# EAGLE board PCBtest_final (EAGLE 9.6.2)
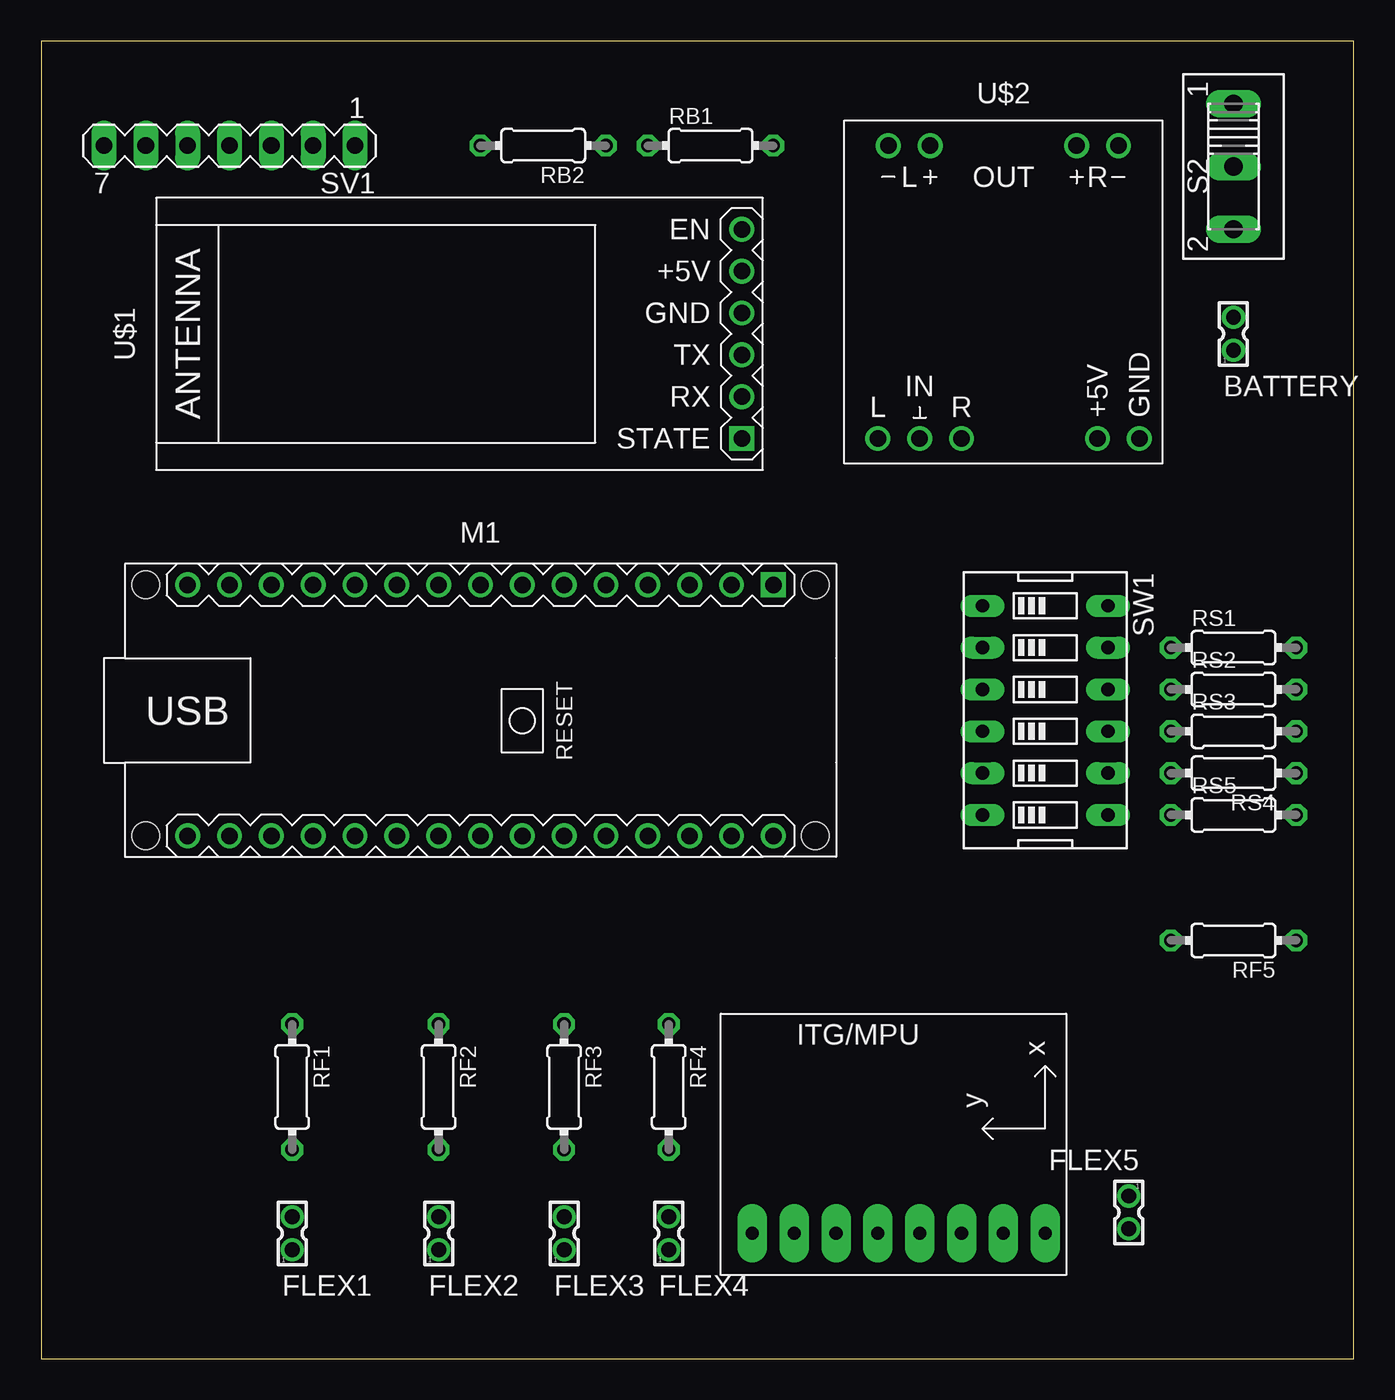
[diagram p0: board, top side]
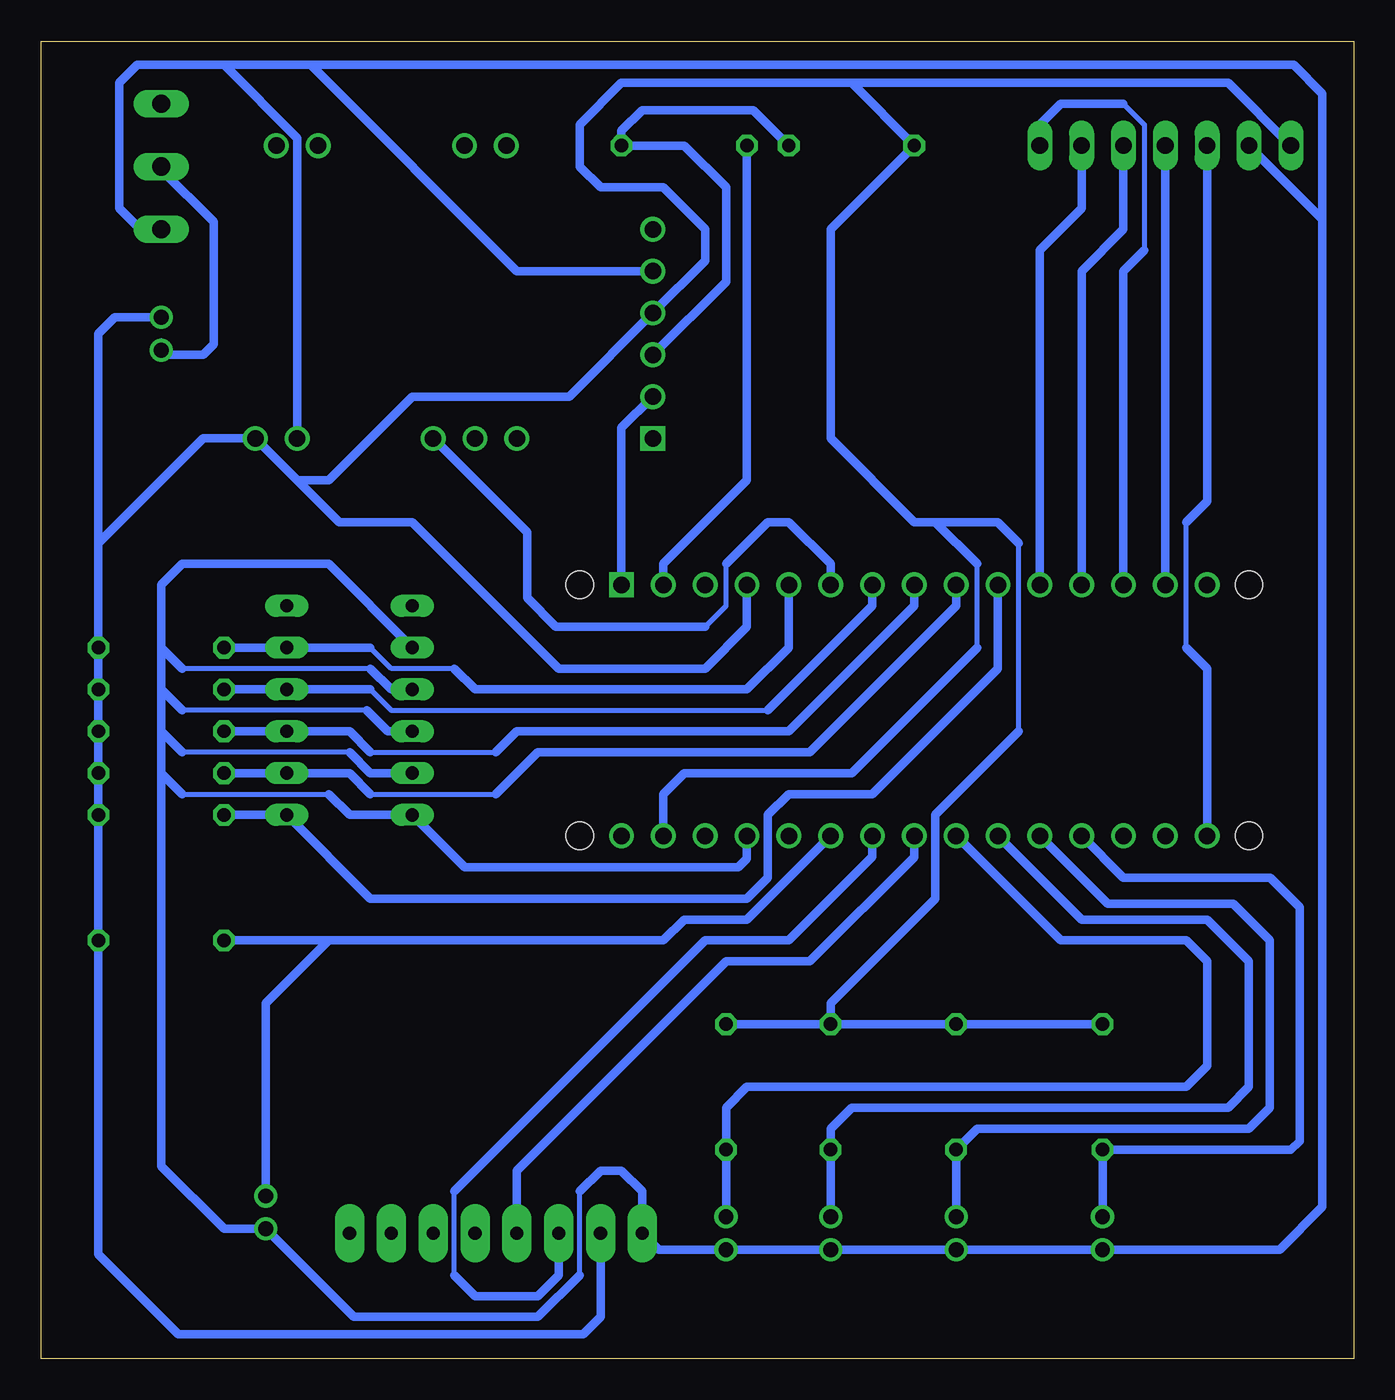
[diagram p1: board, bottom side, seen from below]

Size 79.68 x 80 mm. Coordinates in mm from the lower left corner, seen from the top.
Outline: 0,0 79.68,0 79.68,80 0,80 0,0
Copper layers (1*16): Top 0.035mm / dielectric 1.5mm / Bottom 0.035mm
Design rules "default": minimum track width 6mil, minimum drill 0.35mm, track to track 6mil, track to pad 6mil, pad to pad 6mil, via to via 6mil, smd to smd 6mil, copper to edge 40mil, drill to drill 6mil, minimum pad ring 10mil, minimum via ring 8mil, stop-mask expansion 4mil, vias tented up to drill 0mil, thermal gap 10mil

## Footprints (pad centres in the part's own frame; a part is rotated, then mirrored left to right if it is on the bottom)
332-02 = drill 0.9 pad 1.27: 1 0,-1; 2 0,1
ARDUINO-NANO-3.0 = drill 1 square: J1.1 17.78,7.62 | drill 1: J1.2 15.24,7.62; J1.3 12.7,7.62; J1.4 10.16,7.62; J1.5 7.62,7.62; J1.6 5.08,7.62; J1.7 2.54,7.62; J1.8 0,7.62; J1.9 -2.54,7.62; J1.10 -5.08,7.62; J1.11 -7.62,7.62; J1.12 -10.16,7.62; J1.13 -12.7,7.62; J1.14 -15.24,7.62; J1.15 -17.78,7.62; J2.1 17.78,-7.62; J2.2 15.24,-7.62; J2.3 12.7,-7.62; J2.4 10.16,-7.62; J2.5 7.62,-7.62; J2.6 5.08,-7.62; J2.7 2.54,-7.62; J2.8 0,-7.62; J2.9 -2.54,-7.62; J2.10 -5.08,-7.62; J2.11 -7.62,-7.62; J2.12 -10.16,-7.62; J2.13 -12.7,-7.62; J2.14 -15.24,-7.62; J2.15 -17.78,-7.62 | hole 1.651: -20.32,7.62; -20.32,-7.62; 20.32,-7.62; 20.32,7.62
0204/7 = drill 0.813 octagon: 1 -3.81,0; 2 3.81,0
255SB = drill 1.118 long: 1 -3.81,0; 2 0,0; 3 3.81,0
MA07-1 = drill 1.016 long: 1 -7.62,0; 2 -5.08,0; 3 -2.54,0; 4 0,0; 5 2.54,0; 6 5.08,0; 7 7.62,0
EDG-06 = drill 0.813 long: 1 -6.35,-3.81; 2 -3.81,-3.81; 3 -1.27,-3.81; 4 1.27,-3.81; 5 3.81,-3.81; 6 6.35,-3.81; 7 6.35,3.81; 8 3.81,3.81; 9 1.27,3.81; 10 -1.27,3.81; 11 -3.81,3.81; 12 -6.35,3.81
GY-521 = drill 0.8 pad 1.778 long: ADO -8.89,-6.35; GND -8.89,6.35; INT -8.89,-8.89; SCL -8.89,3.81; SDA -8.89,1.27; VCC -8.89,8.89; XCL -8.89,-3.81; XDA -8.89,-1.27
WIRELESS-BLUETOOTH-HC-05 = drill 1 square: 1 -6.35,-17.145 | drill 1: 2 -3.81,-17.145; 3 -1.27,-17.145; 4 1.27,-17.145; 5 3.81,-17.145; 6 6.35,-17.145
AMPLIFIER-PAM8403 = drill 1: +5V 5.715,-8.89; GND 8.255,-8.89; IN.COM -5.08,-8.89; IN.L -7.62,-8.89; IN.R -2.54,-8.89; OUT.L+ -4.445,8.89; OUT.L- -6.985,8.89; OUT.R+ 4.445,8.89; OUT.R- 6.985,8.89

## Placement (x,y rotation side)
BATTERY  332-02  [332-02]  72.39,62.23 0 top
FLEX1  332-02  [332-02]  15.24,7.62 0 top
FLEX2  332-02  [332-02]  24.13,7.62 0 top
FLEX3  332-02  [332-02]  31.75,7.62 0 top
FLEX4  332-02  [332-02]  38.1,7.62 0 top
FLEX5  332-02  [332-02]  66.04,8.89 180 top
M1  ARDUINO-NANO-3.0  [ARDUINO-NANO-3.0]  26.67,39.37 0 top
RB1  [0204/7]  40.64,73.66 0 top
RB2  [0204/7]  30.48,73.66 180 top
RF1  [0204/7]  15.24,16.51 270 top
RF2  [0204/7]  24.13,16.51 270 top
RF3  [0204/7]  31.75,16.51 270 top
RF4  [0204/7]  38.1,16.51 270 top
RF5  [0204/7]  72.39,25.4 180 top
RS1  [0204/7]  72.39,43.18 0 top
RS2  [0204/7]  72.39,40.64 0 top
RS3  [0204/7]  72.39,38.1 0 top
RS4  [0204/7]  72.39,35.56 180 top
RS5  [0204/7]  72.39,33.02 0 top
S2  [255SB]  72.39,72.39 270 top
SV1  [MA07-1]  11.43,73.66 180 top
SW1  [EDG-06]  60.96,39.37 270 top
U1  GY-521MPU6050  [GY-521]  52.07,16.51 90 top
U$1  WIRELESS-BLUETOOTH-HC-05  [WIRELESS-BLUETOOTH-HC-05]  25.4,62.23 90 top
U$2  AMPLIFIER-PAM8403  [AMPLIFIER-PAM8403]  58.42,64.77 0 top

## Library data of the parts
BATTERY FLEX1-FLEX5 = con-garry
M1 U$1 U$2 = diy-modules
RB1 RB2 RF1-RF5 RS1-RS5 = rcl; SPICEPREFIX: R
S2 = switch
SV1 = con-lstb; OC_FARNELL: unknown; OC_NEWARK: unknown
SW1 = special
U1 = gy-521

## Nets
3V3: M1.J2.14
+5V: FLEX1.1 FLEX2.1 FLEX3.1 FLEX4.1 FLEX5.2 M1.J2.4 S2.3 SV1.6 SW1.2 SW1.3 SW1.4 SW1.5 SW1.6 U1.VCC U$1.5 U$2.+5V
GND: BATTERY.2 M1.J1.4 M1.J2.2 RB2.2 RF1.1 RF2.1 RF3.1 RF4.1 RF5.1 RS1.2 RS2.2 RS3.2 RS4.1 RS5.2 SV1.7 U1.GND U$1.4 U$2.GND
N$1: M1.J1.5 RS1.1 SW1.11
N$2: FLEX5.1 M1.J2.6 RF5.2
N$3: M1.J1.8 RS3.1 SW1.9
N$4: FLEX3.2 M1.J2.10 RF3.2
N$5: M1.J2.8 U1.SDA
N$6: M1.J2.7 U1.SCL
N$7: RB1.2 RB2.1 U$1.3
N$8: FLEX1.2 M1.J2.12 RF1.2
N$9: M1.J1.6 U$2.IN.R
N$10: M1.J1.1 U$1.2
N$11: M1.J1.2 RB1.1
N$12: M1.J1.9 RS4.2 SW1.8
N$13: FLEX4.2 M1.J2.9 RF4.2
N$15: M1.J1.13 SV1.1
N$16: FLEX2.2 M1.J2.11 RF2.2
N$17: M1.J1.11 SV1.2
N$18: M1.J1.12 SV1.3
N$19: BATTERY.1 S2.2
N$20: M1.J1.14 SV1.4
N$21: M1.J2.15 SV1.5
N$23: M1.J1.10 RS5.1 SW1.7
N$24: M1.J1.7 RS2.1 SW1.10
VIN: M1.J2.1

## Tracks (layer width: path | path; a pad name or v marks a point on that pad's centre or on a via)
+5V
  Bottom 0.152: 58.42,35.56 58.64,35.56 | 56.5,32.37 SW1.6 | 57.37,43.18 SW1.2
  Bottom 0.203: SW1.5 58.42,35.56
  Bottom 0.305: 46.99,5.08 46.99,10.16 | 71.12,34.29 62.23,34.29 | 60.96,36.83 71.12,36.83 | 59.91,39.37 71.12,39.37 | 59.69,41.91 71.12,41.91
  Bottom 0.508: U$1.5 50.8,66.04 63.32,78.56 | 72.39,35.56 72.39,38.1 | 72.39,38.1 72.39,40.64 | 72.39,40.64 72.39,43.18 | SW1.3 58.42,40.64 59.69,41.91 | 71.12,41.91 72.39,43.18 | SW1.4 58.64,38.1 59.91,39.37 | 71.12,39.37 72.39,40.64 | 71.12,36.83 72.39,38.1 | 71.12,34.29 72.39,35.56 | 1.89,69.2 1.89,76.82 3.63,78.56 63.32,78.56 | 1.89,69.2 1.89,9.22 4.49,6.62 FLEX1.1 FLEX2.1 FLEX3.1 FLEX4.1 42.18,6.62 U1.VCC 43.18,10.16 44.45,11.43 45.72,11.43 46.99,10.16 | 46.99,5.08 49.53,2.54 60.69,2.54 FLEX5.2 68.58,7.89 72.39,11.7 72.39,35.56 | SV1.6 1.89,69.2 | M1.J2.4 36.83,30.36 37.36,29.83 53.96,29.83 SW1.6 60.96,33.02 62.23,34.29 | S2.3 73.66,68.58 74.93,69.85 74.93,77.47 73.84,78.56 68.58,78.56 | 63.32,78.56 68.58,78.56 | U$2.+5V 64.14,74.12 68.58,78.56 | 72.39,43.18 72.39,46.99 71.12,48.26 62.23,48.26 SW1.2 | 58.42,35.56 59.69,35.56 60.96,36.83
GND
  Bottom 0.152: 76.05,32.87 RS5.2
  Bottom 0.305: 20.32,38.1 20.32,49.53 | 22.86,43.18 22.86,48.26
  Bottom 0.508: RF1.1 RF2.1 RF3.1 | RF3.1 RF4.1 | RF3.1 31.75,21.59 25.4,27.94 25.4,33.02 20.32,38.1 | U1.GND 45.72,2.54 46.76,1.5 71.35,1.5 76.2,6.35 RF5.1 RS5.2 RS4.1 RS3.2 RS2.2 RS1.2 76.2,49.53 | 30.48,77.47 44.45,77.47 46.99,74.93 46.99,72.39 45.72,71.12 41.91,71.12 39.37,68.58 39.37,66.67 U$1.4 47.62,58.42 57.15,58.42 62.23,53.34 64.14,53.34 | 30.48,77.47 RB2.2 31.75,68.58 31.75,55.88 26.67,50.8 25.4,50.8 | 30.48,77.47 7.62,77.47 SV1.7 | 20.32,49.53 21.59,50.8 25.4,50.8 | M1.J2.2 41.91,34.29 40.64,35.56 30.48,35.56 22.86,43.18 | 22.86,48.26 25.4,50.8 | 76.2,49.53 69.85,55.88 U$2.GND 64.14,53.34 | M1.J1.4 36.83,44.45 39.37,41.91 48.26,41.91 57.15,50.8 61.59,50.8 64.14,53.34 | BATTERY.2 75.2,63.23 76.2,62.23 76.2,49.53
N$1
  Bottom 0.305: 59.69,43.18 58.42,41.91 54.61,41.91
  Bottom 0.508: RS1.1 SW1.11 59.69,43.18 | M1.J1.5 34.29,43.18 36.83,40.64 53.34,40.64 54.61,41.91
N$2
  Bottom 0.152: 66.04,25.4 RF5.2
  Bottom 0.508: 62.23,25.4 41.91,25.4 40.64,26.67 36.83,26.67 M1.J2.6 | 62.23,25.4 RF5.2 | FLEX5.1 66.04,21.59 62.23,25.4
N$3
  Bottom 0.305: 59.69,36.83 52.07,36.83
  Bottom 0.508: RS3.1 SW1.9 60.96,38.1 59.69,36.83 | M1.J1.8 26.67,45.72 34.29,38.1 50.8,38.1 52.07,36.83
N$4
  Bottom 0.508: FLEX3.2 RF3.2 31.75,13.97 30.48,15.24 7.62,15.24 6.35,16.51 6.35,24.13 8.89,26.67 16.51,26.67 M1.J2.10
N$5
  Bottom 0.508: M1.J2.8 26.67,30.47 33.01,24.13 38.1,24.13 50.8,11.43 U1.SDA
N$6
  Bottom 0.152: M1.J2.7 29.21,31.63 | U1.SCL 48.26,6.42
  Bottom 0.305: 54.61,5.08 54.61,10.16
  Bottom 0.508: M1.J2.7 29.21,30.48 34.29,25.4 39.37,25.4 54.61,10.16 | U1.SCL 48.26,5.08 49.53,3.81 53.34,3.81 54.61,5.08
N$7
  Bottom 0.508: U$1.3 38.1,65.41 38.1,71.12 40.64,73.66 RB1.2 44.45,74.55 43.18,75.82 36.45,75.82 RB2.1
N$8
  Bottom 0.508: FLEX1.2 RF1.2 3.8,12.7 3.28,13.22 3.28,27.42 5.07,29.21 13.97,29.21 M1.J2.12
N$9
  Bottom 0.305: 39.37,44.45 38.1,45.72 38.1,48.26
  Bottom 0.508: U$2.IN.R 50.18,50.18 50.18,46.2 48.43,44.45 39.37,44.45 | 38.1,48.26 35.56,50.8 34.29,50.8 31.75,48.26 M1.J1.6
N$10
  Bottom 0.508: U$1.2 44.45,56.52 M1.J1.1
N$11
  Bottom 0.508: RB1.1 36.83,53.34 41.91,48.26 M1.J1.2
N$12
  Bottom 0.305: 59.69,34.29 52.07,34.29
  Bottom 0.508: RS4.2 SW1.8 60.96,35.56 59.69,34.29 | M1.J1.9 24.13,45.72 33.02,36.83 49.53,36.83 52.07,34.29
N$13
  Bottom 0.508: FLEX4.2 RF4.2 38.1,15.24 36.83,16.51 10.16,16.51 8.89,17.78 8.89,24.13 10.16,25.4 17.78,25.4 M1.J2.9
N$15
  Bottom 0.305: 13.97,76.2 12.7,74.93 12.7,67.31
  Bottom 0.508: M1.J1.13 13.97,66.04 12.7,67.31 | SV1.1 19.05,74.93 17.78,76.2 13.97,76.2
N$16
  Bottom 0.508: FLEX2.2 RF2.2 22.86,13.97 6.35,13.97 5.08,15.24 5.08,25.4 7.32,27.64 14.94,27.64 M1.J2.11
N$17
  Bottom 0.508: SV1.2 16.51,69.85 19.05,67.31 M1.J1.11
N$18
  Bottom 0.508: SV1.3 13.97,68.58 16.51,66.04 M1.J1.12
N$19
  Bottom 0.152: BATTERY.1 72.39,61.91 | 72.39,72.2 S2.2
  Bottom 0.508: 72.39,72.2 69.22,69.02 69.22,61.59 69.85,60.96 72.12,60.96 BATTERY.1
N$20
  Bottom 0.508: SV1.4 M1.J1.14
N$21
  Bottom 0.305: 10.16,43.18 10.16,50.8
  Bottom 0.508: M1.J2.15 8.89,41.91 10.16,43.18 | 10.16,50.8 8.89,52.07 SV1.5
N$23
  Bottom 0.508: RS5.1 SW1.7 59.69,27.94 36.83,27.94 35.56,29.21 35.56,33.02 34.29,34.29 29.21,34.29 21.59,41.91 M1.J1.10
N$24
  Bottom 0.305: 59.69,40.64 58.42,39.37 35.56,39.37
  Bottom 0.508: RS2.1 SW1.10 59.69,40.64 | M1.J1.7 29.21,45.72 35.56,39.37